# Altium PCB MSXII-Controller-Breakout.PcbDoc
Units mm, origin at the board's own origin, x right, y up, seen from the top; angles counter-clockwise.
Board outline 31 x 25 mm, 2 copper layers (Top Layer, Bottom Layer); 2 components, 32 nets, 112 pads, 0 vias.
Unrouted connection lines stored in the file: 62.
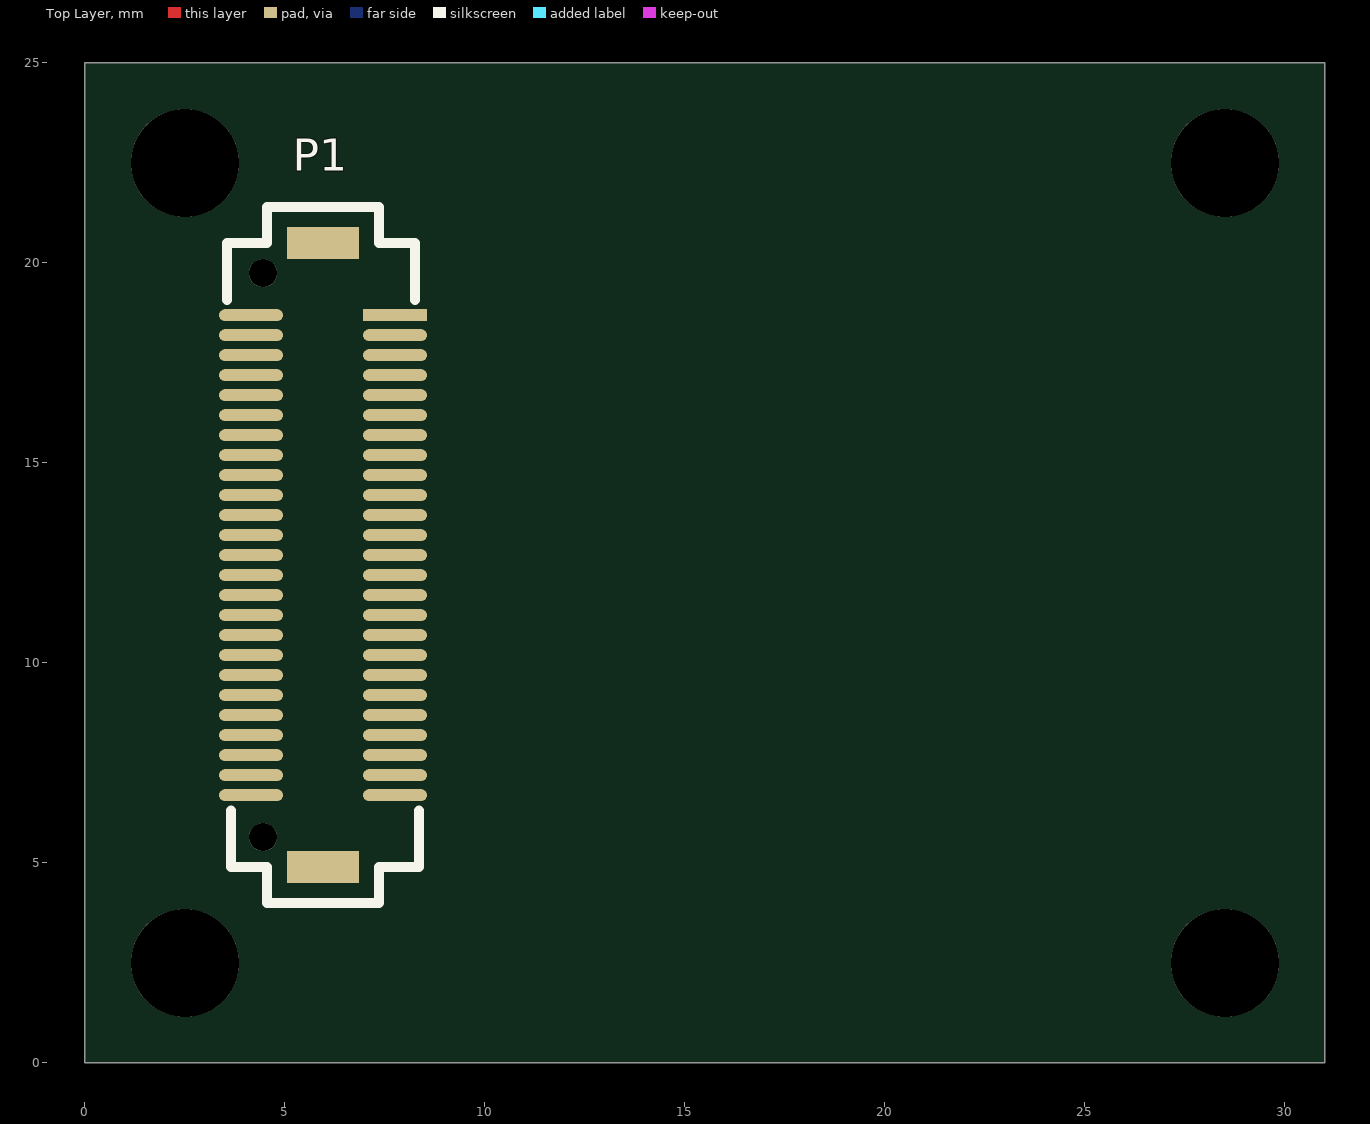
[diagram p0: Top Layer view]
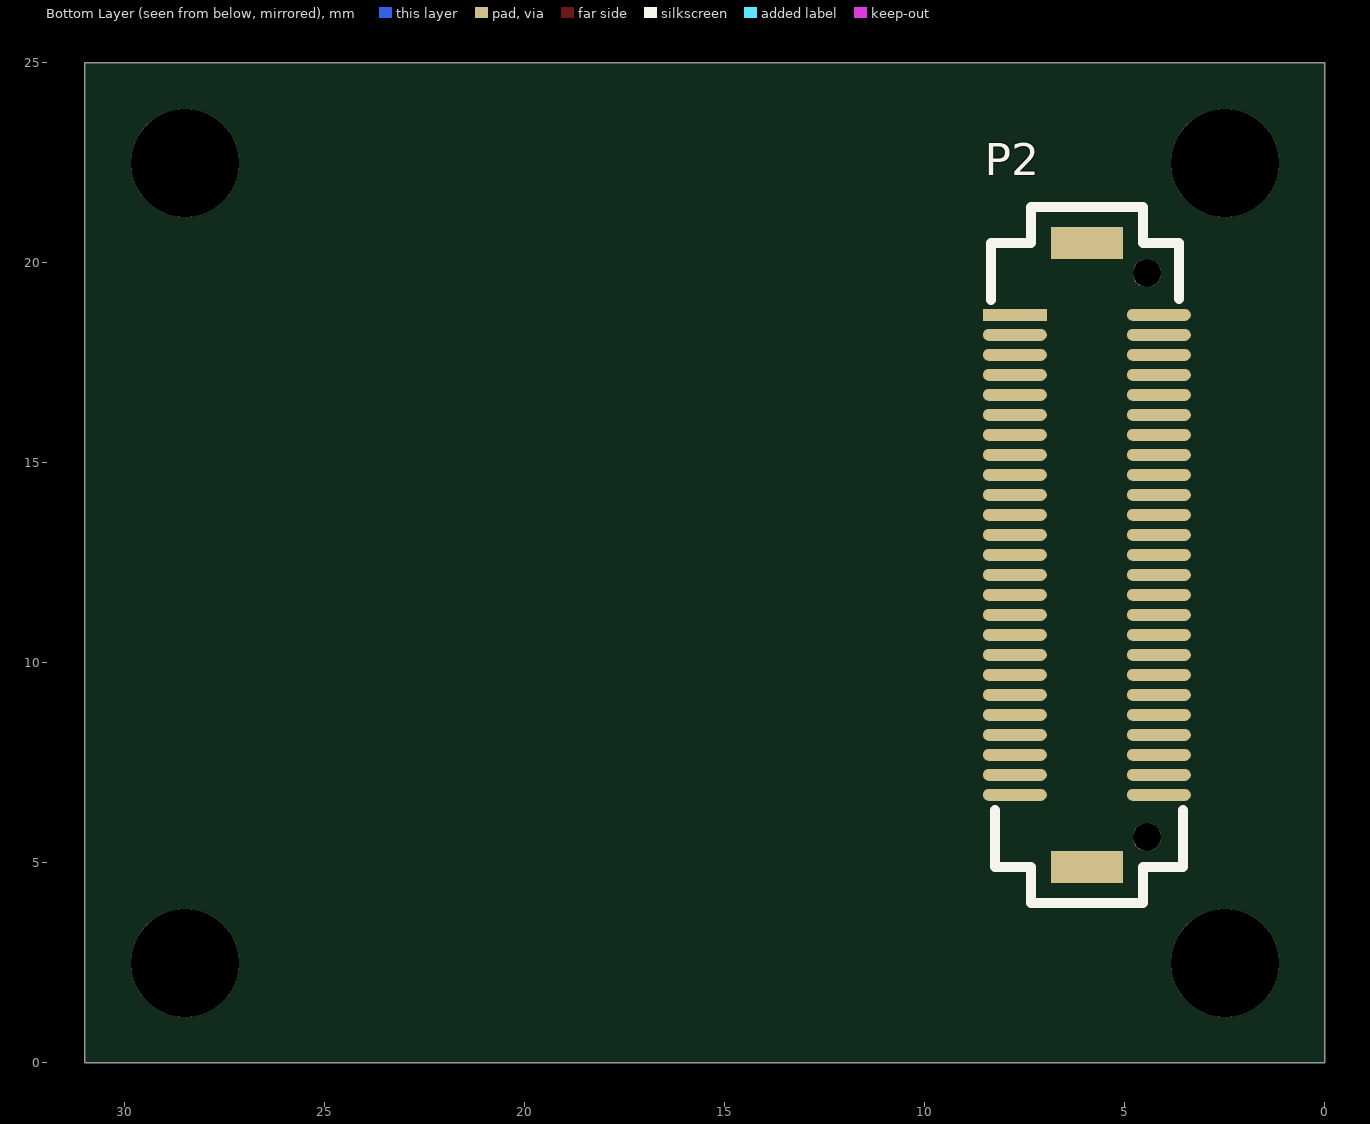
[diagram p1: Bottom Layer view, seen from below]

## Layer stack, top to bottom
Top Solder: solder mask 0.0102, Solder Resist, Dk 3.5
Top Layer: signal copper 0.0356
Dielectric 1: dielectric 0.32, FR-4, Dk 4.8
Bottom Layer: signal copper 0.0356
Bottom Solder: solder mask 0.0102, Solder Resist, Dk 3.5

## Board outline
0,0 31,0 31,25 0,25

## Design rules (kind name [scope] priority, off if disabled: settings)
Clearance [All] p1: gap=0.254
PolygonConnect [All] p1: connectstyle=Relief reliefconductorwidth=0.254 reliefentries=4 polygonreliefangle="90 Angle" airgapwidth=0.254
RoomDefinition Controller_Board_Interface [(InComponentClass('Inside Board Components'))] p1: confinementstyle=ConfineIn formatcopy=TRUE lockcomponents=TRUE outline 0,0 31,0 31,25 0,25
RoutingVias [All] p1: holewidth=0.711 width=1.27 viastyle="Through Hole" minholewidth=0.711 minwidth=1.27 maxholewidth=0.711 maxwidth=1.27
SolderMaskExpansion [All] p1: expansion=0.102
Width [All] p1: maxlimit=0.254 minlimit=0.254 preferedwidth=0.254
30 further rules are at their usual default settings.

## Classes and differential pairs
component class Controller_Board_Interface: P1

## Components (designator, comment, footprint, x,y, rotation, side; value= is the part's Value field where it differs from the comment)
P1 "BergStak Plug" "Bergstak 50 Pos Plug" 5.952,12.694 r0 top
P2 "BergStak Receptacle" "Bergstak 50 Pos Receptacle" 5.952,12.2 r0 bottom

## Footprints (in the part's own frame and the unit in brackets; to place one, negate y for a bottom-side part, rotate by r counter-clockwise, add the part's x,y. Pads: shape width x height; smd on the part's side, far side on the other; paste and mask are expansions set on the pad)
"Bergstak 50 Pos Plug" [mm] "Bergstak 50 Position Plug"
  rect 1.6x0.3 smd: 1(1.8,6)
  oval 1.6x0.3 smd: 2(1.8,5.5) 3(1.8,5) 4(1.8,4.5) 5(1.8,4) 6(1.8,3.5) 7(1.8,3) 8(1.8,2.5) 9(1.8,2) 10(1.8,1.5) 11(1.8,1) 12(1.8,0.5) 13(1.8,0) 14(1.8,-0.5) 15(1.8,-1) 16(1.8,-1.5) 17(1.8,-2) 18(1.8,-2.5) 19(1.8,-3) 20(1.8,-3.5) 21(1.8,-4) 22(1.8,-4.5) 23(1.8,-5) 24(1.8,-5.5) 25(1.8,-6) 26(-1.8,-6) 27(-1.8,-5.5) 28(-1.8,-5) 29(-1.8,-4.5) 30(-1.8,-4) 31(-1.8,-3.5) 32(-1.8,-3) 33(-1.8,-2.5) 34(-1.8,-2) 35(-1.8,-1.5) 36(-1.8,-1) 37(-1.8,-0.5) 38(-1.8,0) 39(-1.8,0.5) 40(-1.8,1) 41(-1.8,1.5) 42(-1.8,2) 43(-1.8,2.5) 44(-1.8,3) 45(-1.8,3.5) 46(-1.8,4) 47(-1.8,4.5) 48(-1.8,5) 49(-1.8,5.5) 50(-1.8,6)
  round 0.7 hole 0.7: ""(-1.5,-7.05) ""(-1.5,7.05)
  rect 1.8x0.8 smd: ""(0,-7.8) ""(0,7.8)
  silkscreen extent -2.4,-8.7 2.4,8.7
"Bergstak 50 Pos Receptacle" [mm] "Bergstak 50 Position Receptacle"
  rect 1.6x0.3 smd: 1(1.8,-6.5)
  oval 1.6x0.3 smd: 2(1.8,-6) 3(1.8,-5.5) 4(1.8,-5) 5(1.8,-4.5) 6(1.8,-4) 7(1.8,-3.5) 8(1.8,-3) 9(1.8,-2.5) 10(1.8,-2) 11(1.8,-1.5) 12(1.8,-1) 13(1.8,-0.5) 14(1.8,0) 15(1.8,0.5) 16(1.8,1) 17(1.8,1.5) 18(1.8,2) 19(1.8,2.5) 20(1.8,3) 21(1.8,3.5) 22(1.8,4) 23(1.8,4.5) 24(1.8,5) 25(1.8,5.5) 26(-1.8,5.5) 27(-1.8,5) 28(-1.8,4.5) 29(-1.8,4) 30(-1.8,3.5) 31(-1.8,3) 32(-1.8,2.5) 33(-1.8,2) 34(-1.8,1.5) 35(-1.8,1) 36(-1.8,0.5) 37(-1.8,0) 38(-1.8,-0.5) 39(-1.8,-1) 40(-1.8,-1.5) 41(-1.8,-2) 42(-1.8,-2.5) 43(-1.8,-3) 44(-1.8,-3.5) 45(-1.8,-4) 46(-1.8,-4.5) 47(-1.8,-5) 48(-1.8,-5.5) 49(-1.8,-6) 50(-1.8,-6.5)
  round 0.7 hole 0.7: ""(-1.5,-7.55) ""(-1.5,6.55)
  rect 1.8x0.8 smd: ""(0,-8.3) ""(0,7.3)
  silkscreen extent -2.4,-9.2 2.4,8.2

## Part data
P1: library part "BergStak 50 Position Connector Plug", "50 Position Connector Plug, Outer Shroud Contacts Surface Mount Gold"
P2: library part "BergStak 50 Position Connector Receptacle", "50 Position Connector Receptacle, Center Strip Contacts Surface Mount Gold"

## Free pads (board coordinates)
  round 2.7 hole 2.7: ""(2.5,2.5) ""(2.5,22.5) ""(28.5,2.5) ""(28.5,22.5)

## Nets (pads, with @x,y where several pads share a name; then routed paths per layer and width w, separated by ;. In a path a pad name is that pad's centre, name@x,y a point inside that pad or via, vN(x,y) a via of type N, cw(c..) or ccw(c..) an arc to the next point about the centre after c; other vN are vias at no path point)
3V3: P1.40 P1.41 P1.42 P1.43 P1.44 P1.45 P2.40 P2.41 P2.42 P2.43 P2.44 P2.45
+12V: P1.47 P1.48 P1.49 P1.50 P2.47 P2.48 P2.49 P2.50
GND: P1.1 P1.2 P1.3 P1.4 P1.26 P1.27 P1.28 P1.29 P2.1 P2.2 P2.3 P2.4 P2.26 P2.27 P2.28 P2.29
PA0: P1.25 P2.25
PA1: P1.24 P2.24
PA2/USART2_TX: P1.23 P2.23
PA3/USART2_RX: P1.22 P2.22
PA4/SPI1_NSS: P1.21 P2.21
PA5/SPI1_SCK: P1.20 P2.20
PA6/SPI1_MISO: P1.19 P2.19
PA7/SPI1_MOSI: P1.18 P2.18
PA8: P1.7 P2.7
PA9: P1.6 P2.6
PA10: P1.5 P2.5
PA15: P1.39 P2.39
PB0: P1.17 P2.17
PB1: P1.16 P2.16
PB2: P1.15 P2.15
PB3: P1.38 P2.38
PB4: P1.37 P2.37
PB5: P1.36 P2.36
PB6/USART1_TX: P1.34 P2.34
PB7/USART1_RX: P1.33 P2.33
PB8/I2C1_SCL: P1.32 P2.32
PB9/I2C1_SDA: P1.31 P2.31
PB10/USART3_TX/I2C2_SCL: P1.14 P2.14
PB11/USART3_RX/I2C2_SDA: P1.13 P2.13
PB12/SPI2_NSS: P1.11 P2.11
PB13/SPI2_SCK: P1.10 P2.10
PB14/SPI2_MISO: P1.9 P2.9
PB15/SPI2_MOSI: P1.8 P2.8
PC13: P1.30 P2.30
pads on no net: P1. P1.12 P1.35 P1.46 P2. P2.12 P2.35 P2.46